# Altium PCB PCB2.PcbDoc (part 1 of 2)
Units mm, origin at the board's own origin, x right, y up, seen from the top; angles counter-clockwise.
Board outline 158 x 54 mm, 2 copper layers (Top Layer, Bottom Layer); 125 components, 171 nets, 620 pads, 62 vias.
Unrouted connection lines stored in the file: 120.
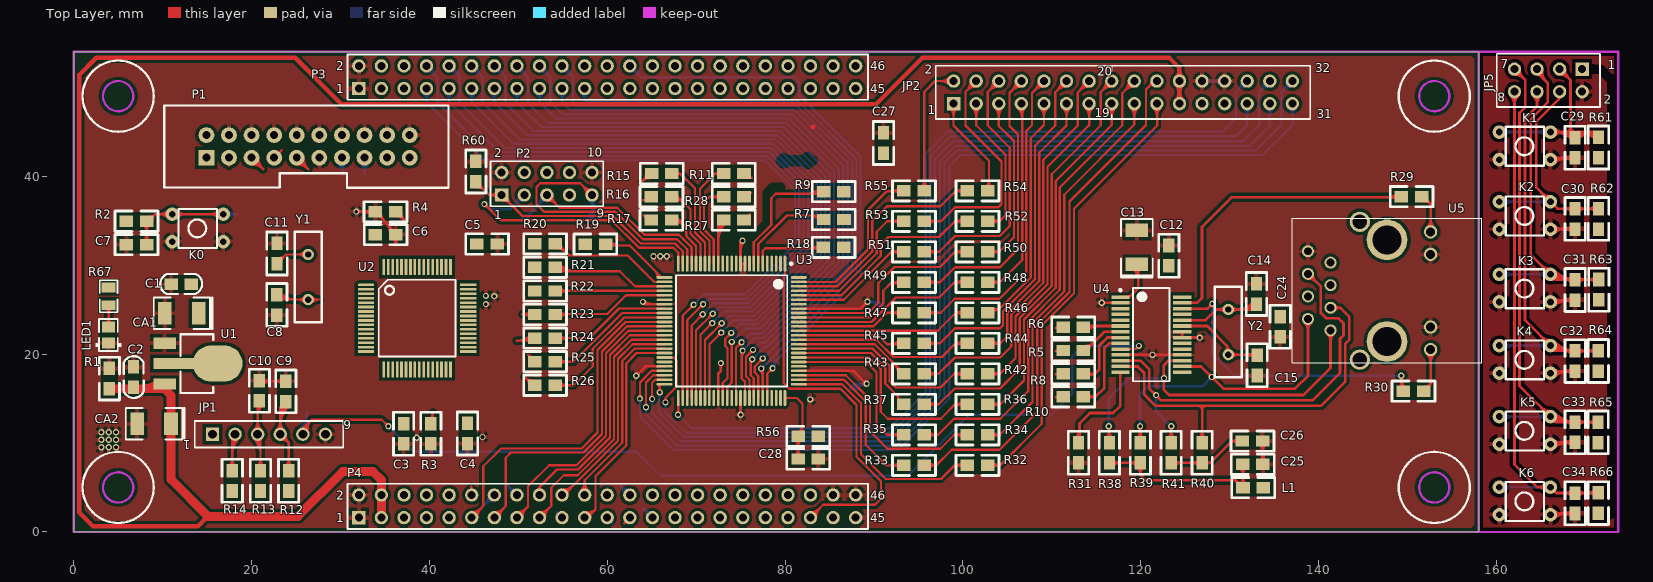
[diagram p0: Top Layer view]
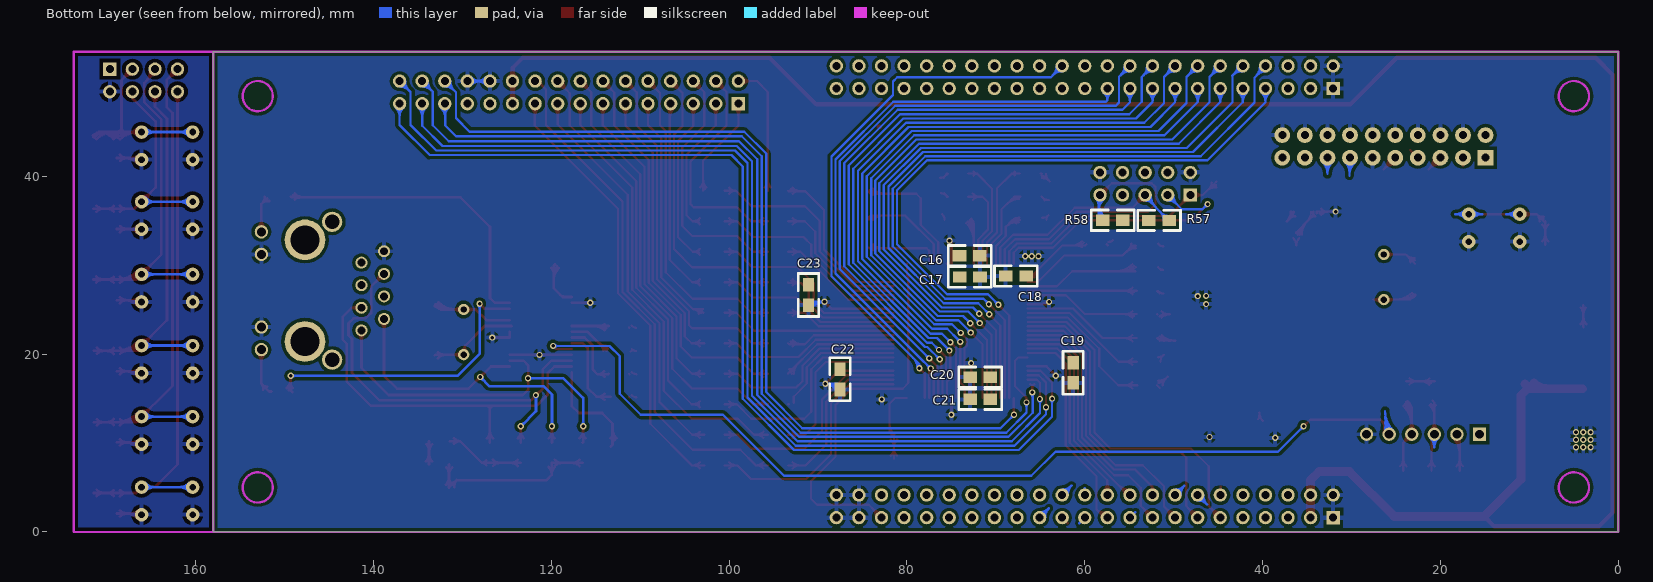
[diagram p1: Bottom Layer view, seen from below]

## Layer stack, top to bottom
Top Layer: signal copper 0.0356
Dielectric: dielectric 0.32, FR-4, Dk 4.8
Bottom Layer: signal copper 0.0356

## Board outline
0,0 0,54 158,54 158,0

## Design rules (kind name [scope] priority, off if disabled: settings)
Clearance [All] p1: gap=0.35
ComponentClearance [All] p1: gap=0.254 collisioncheckmode=3 verticalgap=0.254
PolygonConnect [All] p1: connectstyle=Relief reliefconductorwidth=0.5 reliefentries=4 polygonreliefangle="90 Angle"
RoutingVias [All] p1: holewidth=0.711 width=1.27 viastyle="Through Hole" minholewidth=0.711 minwidth=1.27 maxholewidth=0.711 maxwidth=1.27
SolderMaskExpansion [All] p1: expansion=0.102
TestPointUsage [All] p1: valid=0 allowmultiple=FALSE
Testpoint [All] p1: side=15 testpointundercomponent=TRUE minsize=1.016 maxsize=2.54 preferedsize=1.524 minholesize=0 maxholesize=1.016 preferedholesize=0.813 testpointgrid=0.025 style=1023 order=0-112345678
Width [All] p1: maxlimit=2 minlimit=0.254 preferedwidth=0.254 toplayer_prefwidth=0.3 bottomlayer_prefwidth=0.3 minimp=50.000000 maximp=50.000000 favimp=50.000000
18 further rules are at their usual default settings.

## Components (designator, comment, footprint, x,y, rotation, side; value= is the part's Value field where it differs from the comment)
C1 "0.1uF" 0805_CAP 12.93,27.74 r180 top
C2 "0.1uF" 0805_CAP 6.61,16.57 r90 top
C3 "104" C0805 37.11,9.644 r270 top
C4 "104" C0805 44.29,9.67 r270 top
C5 "104" C0805 47.89,32.38 r0 top
C6 "104" C0805 36.47,33.42 r0 top
C7 "104" C0805 8.46,32.3 r0 top
C8 "Cap" C0805 22.84,24.13 r270 top
C9 "101" C0805 23.85,14.4 r270 top
C10 "101" C0805 20.88,14.48 r270 top
C11 "Cap" C0805 22.87,29.91 r270 top
C12 "Cap Semi" C0805 123.16,32.46 r90 top
C13 "Cap Pol3" 1210C 119.59,30.13 r90 top
C14 "Cap Semi" C0805 133.01,28.15 r90 top
C15 "Cap Semi" C0805 133.09,17.33 r270 top
C16 "Cap" C0805 74.34,31.06 r0 bottom
C17 "Cap" C0805 74.32,28.66 r0 bottom
C18 "Cap" C0805 66.35,28.77 r180 bottom
C19 "Cap" C0805 61.31,19.29 r90 bottom
C20 "Cap" C0805 70.35,17.4 r180 bottom
C21 "Cap" C0805 70.35,14.9 r180 bottom
C22 "Cap" C0805 87.53,18.55 r90 bottom
C23 "Cap" C0805 91.07,28.03 r90 bottom
C24 "Cap Semi" C0805 135.67,21.67 r270 top
C25 "Cap Semi" C0805 131.2,7.59 r180 top
C26 "Cap Semi" C0805 131.17,10.21 r180 top
C27 "Cap" C0805 91.07,42.34 r270 top
C28 "Cap" C0805 81.21,8.2 r180 top
C29 "104" C0805 168.84,44.59 r90 top
C30 "104" C0805 168.84,36.594 r90 top
C31 "104" C0805 168.84,28.598 r90 top
C32 "104" C0805 168.84,20.602 r90 top
C33 "104" C0805 168.84,12.606 r90 top
C34 "104" C0805 168.84,4.61 r90 top
CA1 "4.7UF/16V" 3528cap 14.05,24.61 r180 top
CA2 "10UF/16V" 3528cap 10.92,12.18 r180 top
JP1 "ISP" PIN-FHEADER-1*6-2.54 15.61,10.98 r0 top
JP2 "Header2*16" PIN-S-2.54-2*16 98.95,48.18 r0 top locked
JP5 "Header2*4" PIN-S-2.54-2*4 169.64,52.04 r180 top
K0 "KEY" KEY-DIP 13.9,34.14 r180 top
K1 "SW-SPST" KEY-DIP 163.14,43.37 r180 top
K2 "SW-SPST" KEY-DIP 163.14,35.54 r180 top
K3 "SW-SPST" KEY-DIP 163.14,27.37 r180 top
K4 "SW-SPST" KEY-DIP 163.14,19.36 r180 top
K5 "SW-SPST" KEY-DIP 163.14,11.37 r180 top
K6 "SW-SPST" KEY-DIP 163.14,3.44 r180 top
L1 "Inductor" R0805 132.41,5.12 r180 top
LED1 "0805/Green" LED-0805 3.01,23.64 r270 top
P1 "Header 10X2" IDC-20 14.9,42.08 r0 top
P2 "Header 5X2" HDR2X5 48.13,37.88 r0 top
P3 "Header 23X2" HDR2X23 32.06,49.86 r0 top locked
P4 "Header 23X2" HDR2X23 32.06,1.604 r0 top locked
R1 "10K" 0805 4.01,18.38 r270 top
R2 "10k" R0805 7.29,34.78 r0 top
R3 "Res2" R0805 40.32,11.27 r90 top
R4 "Res2" R0805 35.29,35.84 r0 top
R5 "Res Semi" R0805 112.63,20.25 r0 top
R6 "Res Semi" R0805 112.63,22.86 r0 top
R7 "Res Semi" R0805 85.71,34.975 r0 top
R8 "Res Semi" R0805 112.63,17.63 r0 top
R9 "Res Semi" R0805 85.7,38.11 r0 top
R10 "Res Semi" R0805 112.63,15.04 r0 top
R11 "Res Semi" R0805 74.466,40.145 r0 top
R12 "Res2" R0805 24.03,5.51 r270 top
R13 "Res2" R0805 20.855,5.51 r270 top
R14 "Res2" R0805 17.68,5.51 r270 top
R15 "Res Semi" R0805 65.9,40.45 r180 top
R16 "Res Semi" R0805 65.88,37.84 r180 top
R17 "Res Semi" R0805 65.86,35.217 r180 top
R18 "Res Semi" R0805 85.68,31.84 r0 top
R19 "Res Semi" R0805 58.44,32.51 r180 top
R20 "Res Semi" R0805 52.78,32.55 r180 top
R21 "Res Semi" R0805 52.78,29.898 r180 top
R22 "Res Semi" R0805 52.78,27.247 r180 top
R23 "Res Semi" R0805 52.78,24.595 r180 top
R24 "Res Semi" R0805 52.78,21.943 r180 top
R25 "Res Semi" R0805 52.78,19.292 r180 top
R26 "Res Semi" R0805 52.78,16.64 r180 top
R27 "Res Semi" R0805 74.466,34.913 r0 top
R28 "Res Semi" R0805 74.466,37.535 r0 top
R29 "Res Semi" R0805 150.68,37.55 r0 top
R30 "Res Semi" R0805 150.9,15.67 r0 top
R31 "Res Semi" R0805 113.15,9.13 r90 top
R32 "Res2" R0805 101.404,7.63 r180 top
R33 "Res2" R0805 94.274,7.63 r180 top
R34 "Res2" R0805 101.404,11.061 r180 top
R35 "Res2" R0805 94.274,11.061 r180 top
R36 "Res2" R0805 101.404,14.492 r180 top
R37 "Res2" R0805 94.274,14.492 r180 top
R38 "Res Semi" R0805 116.625,9.13 r90 top
R39 "Res Semi" R0805 120.1,9.13 r90 top
R40 "Res Semi" R0805 127.05,9.13 r90 top
R41 "Res Semi" R0805 123.575,9.13 r90 top
R42 "Res2" R0805 101.404,17.923 r180 top
R43 "Res2" R0805 94.274,17.923 r180 top
R44 "Res2" R0805 101.404,21.355 r180 top
R45 "Res2" R0805 94.274,21.355 r180 top
R46 "Res2" R0805 101.404,24.786 r180 top
R47 "Res2" R0805 94.274,24.786 r180 top
R48 "Res2" R0805 101.404,28.217 r180 top
R49 "Res2" R0805 94.274,28.217 r180 top
R50 "Res2" R0805 101.404,31.648 r180 top
R51 "Res2" R0805 94.274,31.648 r180 top
R52 "Res2" R0805 101.404,35.079 r180 top
R53 "Res2" R0805 94.274,35.079 r180 top
R54 "Res2" R0805 101.404,38.51 r180 top
R55 "Res2" R0805 94.274,38.51 r180 top
R56 "Res2" R0805 82.83,10.59 r0 top
R57 "Res2" R0805 51.87,35.18 r0 bottom
R58 "Res2" R0805 56.62,34.89 r180 bottom
R60 "Res2" R0805 45.07,40.3 r270 top
R61 "Res2" R0805 171.32,42.99 r270 top
R62 "Res2" R0805 171.32,34.97 r270 top
R63 "Res2" R0805 171.35,27.01 r270 top
R64 "Res2" R0805 171.29,18.99 r270 top
R65 "Res2" R0805 171.27,10.96 r270 top
R66 "Res2" R0805 171.29,3.01 r270 top
R67 "1K/1%/0805/1/8W" R-0805 4.83,24.99 r90 top
U1 "AS1117-3.3V" SOT-223 16.17,18.93 r270 top
U2 "STM32" LQFP64 32.87,27.78 r0 top locked
U3 "EPM240GT100C5N" TQFP100_N 73.99,22.61 r270 top locked
U4 "ENC28J60" ENC28J60-ss 121.18,22.18 r0 top
U5 "HR911105A-RJ45" HR911105A 147.69,27.12 r270 top locked
Y1 "8MHZ" XTAL 26.37,26.12 r90 top
Y2 "25M" xtal 129.84,25.01 r270 top

## Footprints (in the part's own frame and the unit in brackets; to place one, negate y for a bottom-side part, rotate by r counter-clockwise, add the part's x,y. Pads: shape width x height; smd on the part's side, far side on the other; paste and mask are expansions set on the pad)
0805 [mil]
  rect 60x50 smd: 1(0,0) 2(90,0)
  silkscreen extent -50,-45 140,45
0805_CAP [mm]
  rect 1.524x1.27 smd: 1(-0.31,-0.11) 2(1.976,-0.11)
  silkscreen extent -1.51,-1.26 3.19,0.99
1210C [mil]
  rect 60x100 smd: 1(-1,1) 2(149,1)
  silkscreen extent -61,-69 199,71
3528cap [mil]
  rect 60x100 smd: 1(-1,1) 2(149,1)
  silkscreen extent -61,-69 199,71
C0805 [mil]
  rect 60x50 smd: 1(-100,0) 2(-10,0)
  silkscreen extent -150,-45 40,45
ENC28J60-ss [mm] "SOP, 28-Leads, Body 10.5x5.6mm (max), Pitch 0"
  rect 2.05x0.4 smd: 1(-3.475,4.225) 2(-3.475,3.575) 3(-3.475,2.925) 4(-3.475,2.275) 5(-3.475,1.625) 6(-3.475,0.975) 7(-3.475,0.325) 8(-3.475,-0.325) 9(-3.475,-0.975) 10(-3.475,-1.625) 11(-3.475,-2.275) 12(-3.475,-2.925) 13(-3.475,-3.575) 14(-3.475,-4.225) 15(3.475,-4.225) 16(3.475,-3.575) 17(3.475,-2.925) 18(3.475,-2.275) 19(3.475,-1.625) 20(3.475,-0.975) 21(3.475,-0.325) 22(3.475,0.325) 23(3.475,0.975) 24(3.475,1.625) 25(3.475,2.275) 26(3.475,2.925) 27(3.475,3.575) 28(3.475,4.225)
  silkscreen extent -3.6,-5.25 2.05,5.25, body extent -2.8,-5.25 2.8,5.25, height 2
HDR2X5 [mm] "Connector; Header; 5x2 Position"
  rect 1.5x1.5 hole 0.9: 1(0,0)
  round 1.5 hole 0.9: 2(0,2.54) 3(2.54,0) 4(2.54,2.54) 5(5.08,0) 6(5.08,2.54) 7(7.62,0) 8(7.62,2.54) 9(10.16,0) 10(10.16,2.54)
  silkscreen extent -1.27,-1.27 11.43,3.81
HDR2X23 [mm] "Connector; Header; 23x2 Position"
  rect 1.5x1.5 hole 0.9: 1(0,0)
  round 1.5 hole 0.9: 2(0,2.54) 3(2.54,0) 4(2.54,2.54) 5(5.08,0) 6(5.08,2.54) 7(7.62,0) 8(7.62,2.54) 9(10.16,0) 10(10.16,2.54) 11(12.7,0) 12(12.7,2.54) 13(15.24,0) 14(15.24,2.54) 15(17.78,0) 16(17.78,2.54) 17(20.32,0) 18(20.32,2.54) 19(22.86,0) 20(22.86,2.54) 21(25.4,0) 22(25.4,2.54) 23(27.94,0) 24(27.94,2.54) 25(30.48,0) 26(30.48,2.54) 27(33.02,0) 28(33.02,2.54) 29(35.56,0) 30(35.56,2.54) 31(38.1,0) 32(38.1,2.54) 33(40.64,0) 34(40.64,2.54) 35(43.18,0) 36(43.18,2.54) 37(45.72,0) 38(45.72,2.54) 39(48.26,0) 40(48.26,2.54) 41(50.8,0) 42(50.8,2.54) 43(53.34,0) 44(53.34,2.54) 45(55.88,0) 46(55.88,2.54)
  silkscreen extent -1.27,-1.27 57.28,3.81
HR911105A [mm]
  round 1.35 hole 0.89: 1(4.46,-6.35) 2(3.18,-8.89) 3(1.92,-6.35) 4(0.64,-8.89) 5(-0.62,-6.35) 6(-1.9,-8.89) 7(-3.16,-6.35) 8(-4.44,-8.89)
  round 1.5 hole 1.02: 9(6.625,4.9) 10(4.085,4.9) 11(-4.085,4.9) 12(-6.625,4.9)
  round 2.286 hole 1.63: ""(-7.745,-3.05) ""(7.745,-3.05)
  round 4.572 hole 3.25: ""(-5.715,0) ""(5.715,0)
  silkscreen extent -8.13,-10.67 8.13,10.67
IDC-20 [mil]
  rect 70x70 hole 35: 1(1,0)
  round 70 hole 35: 2(1,100) 3(101,0) 4(101,100) 5(201,0) 6(201,100) 7(301,0) 8(301,100) 9(401,0) 10(401,100) 11(501,0) 12(501,100) 13(601,0) 14(601,100) 15(701,0) 16(701,100) 17(801,0) 18(801,100) 19(901,0) 20(901,100)
  silkscreen extent -185,-133 1073,231
KEY-DIP [mil]
  round 60 hole 30: 1(-115,59.45) 2(-115,-62.6) 3(111,-62.6) 4(111,59.45)
  silkscreen extent -87,-86 83,87
LED-0805 [mm]
  rect 1.2x1.5 smd: 1(0.6,0.9) 2(2.4,0.9)
  silkscreen extent -0.3,-0.55 3.3,2.35
LQFP64 [mm]
  oval 1.8x0.3 smd: 1(0,0)
  rect 1.8x0.3 smd: 2(0,-0.5) 3(0,-1) 4(0,-1.5) 5(0,-2) 6(0,-2.5) 7(0,-3) 8(0,-3.5) 9(0,-4) 10(0,-4.5) 11(0,-5) 12(0,-5.5) 13(0,-6) 14(0,-6.5) 15(0,-7) 16(0,-7.5) 33(11.5,-7.5) 34(11.5,-7) 35(11.5,-6.5) 36(11.5,-6) 37(11.5,-5.5) 38(11.5,-5) 39(11.5,-4.5) 40(11.5,-4) 41(11.5,-3.5) 42(11.5,-3) 43(11.5,-2.5) 44(11.5,-2) 45(11.5,-1.5) 46(11.5,-1) 47(11.5,-0.5) 48(11.5,0)
  rect 0.3x1.8 smd: 17(2,-9.5) 18(2.5,-9.5) 19(3,-9.5) 20(3.5,-9.5) 21(4,-9.5) 22(4.5,-9.5) 23(5,-9.5) 24(5.5,-9.5) 25(6,-9.5) 26(6.5,-9.5) 27(7,-9.5) 28(7.5,-9.5) 29(8,-9.5) 30(8.5,-9.5) 31(9,-9.5) 32(9.5,-9.5) 49(9.5,2) 50(9,2) 51(8.5,2) 52(8,2) 53(7.5,2) 54(7,2) 55(6.5,2) 56(6,2) 57(5.5,2) 58(5,2) 59(4.5,2) 60(4,2) 61(3.5,2) 62(3,2) 63(2.5,2) 64(2,2)
  silkscreen extent 1.43,-8.07 10.07,0.56
PIN-FHEADER-1*6-2.54 [mm]
  rect 1.5x1.5 hole 1: 1(0,0)
  round 1.5 hole 1: 2(2.54,0) 3(5.08,0) 4(7.62,0) 5(10.16,0) 6(12.7,0)
  silkscreen extent -2,-1.5 14.7,1.5
PIN-S-2.54-2*4 [mm]
  rect 1.5x1.5 hole 0.9: 1(0,0)
  round 1.5 hole 0.9: 2(0,2.54) 3(2.54,0) 4(2.54,2.54) 5(5.08,0) 6(5.08,2.54) 7(7.62,0) 8(7.62,2.54)
  silkscreen extent -2,-1.73 9.62,4.27
PIN-S-2.54-2*16 [mm]
  rect 1.5x1.5 hole 0.9: 1(0,-0.025)
  round 1.5 hole 0.9: 2(0,2.515) 3(2.54,-0.025) 4(2.54,2.515) 5(5.08,-0.025) 6(5.08,2.515) 7(7.62,-0.025) 8(7.62,2.515) 9(10.16,-0.025) 10(10.16,2.515) 11(12.7,-0.025) 12(12.7,2.515) 13(15.24,-0.025) 14(15.24,2.515) 15(17.78,-0.025) 16(17.78,2.515) 17(20.32,-0.025) 18(20.32,2.515) 19(22.86,-0.025) 20(22.86,2.515) 21(25.4,-0.025) 22(25.4,2.515) 23(27.94,-0.025) 24(27.94,2.515) 25(30.48,-0.025) 26(30.48,2.515) 27(33.02,-0.025) 28(33.02,2.515) 29(35.56,-0.025) 30(35.56,2.515) 31(38.1,-0.025) 32(38.1,2.515)
  silkscreen extent -2,-1.76 40.1,4.24
R0805 [mil]
  rect 60x50 smd: 1(-54,6) 2(36,6)
  silkscreen extent -104,-39 86,51
R-0805 [mm]
  rect 1.1x1.6 smd: 1(0.5,0.9) 2(2.5,0.9)
  silkscreen extent -0.3,-0.1 3.3,1.9
SOT-223 [mil]
  rect 50x100 smd: 1(-90.5,-234) 3(90.5,-234)
  oval 160x220 smd: 2(0,1)
  rect 50x200 smd: 2(0,-184)
  silkscreen extent -130,-164 130,-19
TQFP100_N [mm] "100-Pin Plastic Thin Quad Flat Pack (TQFP100), IPC Medium Density"
  oval 1.8x0.3 smd: 1(-7.55,6) 2(-7.55,5.5) 3(-7.55,5) 4(-7.55,4.5) 5(-7.55,4) 6(-7.55,3.5) 7(-7.55,3) 8(-7.55,2.5) 9(-7.55,2) 10(-7.55,1.5) 11(-7.55,1) 12(-7.55,0.5) 13(-7.55,0) 14(-7.55,-0.5) 15(-7.55,-1) 16(-7.55,-1.5) 17(-7.55,-2) 18(-7.55,-2.5) 19(-7.55,-3) 20(-7.55,-3.5) 21(-7.55,-4) 22(-7.55,-4.5) 23(-7.55,-5) 24(-7.55,-5.5) 25(-7.55,-6) 51(7.55,-6) 52(7.55,-5.5) 53(7.55,-5) 54(7.55,-4.5) 55(7.55,-4) 56(7.55,-3.5) 57(7.55,-3) 58(7.55,-2.5) 59(7.55,-2) 60(7.55,-1.5) 61(7.55,-1) 62(7.55,-0.5) 63(7.55,0) 64(7.55,0.5) 65(7.55,1) 66(7.55,1.5) 67(7.55,2) 68(7.55,2.5) 69(7.55,3) 70(7.55,3.5) 71(7.55,4) 72(7.55,4.5) 73(7.55,5) 74(7.55,5.5) 75(7.55,6)
  oval 0.3x1.8 smd: 26(-6,-7.55) 27(-5.5,-7.55) 28(-5,-7.55) 29(-4.5,-7.55) 30(-4,-7.55) 31(-3.5,-7.55) 32(-3,-7.55) 33(-2.5,-7.55) 34(-2,-7.55) 35(-1.5,-7.55) 36(-1,-7.55) 37(-0.5,-7.55) 38(0,-7.55) 39(0.5,-7.55) 40(1,-7.55) 41(1.5,-7.55) 42(2,-7.55) 43(2.5,-7.55) 44(3,-7.55) 45(3.5,-7.55) 46(4,-7.55) 47(4.5,-7.55) 48(5,-7.55) 49(5.5,-7.55) 50(6,-7.55) 76(6,7.55) 77(5.5,7.55) 78(5,7.55) 79(4.5,7.55) 80(4,7.55) 81(3.5,7.55) 82(3,7.55) 83(2.5,7.55) 84(2,7.55) 85(1.5,7.55) 86(1,7.55) 87(0.5,7.55) 88(0,7.55) 89(-0.5,7.55) 90(-1,7.55) 91(-1.5,7.55) 92(-2,7.55) 93(-2.5,7.55) 94(-3,7.55) 95(-3.5,7.55) 96(-4,7.55) 97(-4.5,7.55) 98(-5,7.55) 99(-5.5,7.55) 100(-6,7.55)
  silkscreen extent -7.67,-6.25 6.25,6.83, body extent -7,-7 7,7, height 1.2
XTAL [mil]
  round 50 hole 28: 1(0,0) 2(200,0)
  silkscreen extent -100,-60 300,60
xtal [mil]
  round 50 hole 28: 1(0,0) 2(200,0)
  silkscreen extent -100,-60 300,60

## Part data
C1 C2: library part C
C3 C4 C5 C6: library part CAP, "Capacitor"
C7 C9 C10 C29 C30 C31 C32 C33 C34: library part Cap, "Capacitor"
C8 C11 C16 C17 C18 C19 C20 C21 C22 C23 C27 C28: "Capacitor"
C12 C14 C15 C24 C25 C26: "Capacitor (Semiconductor SIM Model)"
C13: "Polarized Capacitor (Surface Mount)"
CA1 CA2: library part ECAP
JP1: library part Header1*6
K1 K2 K3 K4 K5 K6: "Single-Pole, Single-Throw Switch"
LED1: library part ASD-0012AA
P1: "Header, 10-Pin, Dual row"
P2: "Header, 5-Pin, Dual row"
P3 P4: "Header, 23-Pin, Dual row"
R1: library part Res2, "Resistor"
R2: library part Res3, "Resistor"
R3 R4 R12 R13 R14 R32 R33 R34 R35 R36 R37 R42 R43 R44 R45 R46 R47 R48 R49 R50 R51 R52 R53 R54 R55 R56 R57 R58 R60 R61 R62 R63 R64 R65 R66: "Resistor"
R5 R6 R7 R8 R9 R10 R11 R15 R16 R17 R18 R19 R20 R21 R22 R23 R24 R25 R26 R27 R28 R29 R30 R31 R38 R39 R40 R41: "Semiconductor Resistor"
R67: library part ASR-0028BA
U1: library part AS1117
U2: library part STM32F103RE
U3: "MAX II 1.8V CPLD, 80 IOs, 240 Logic Elements, 100-Pin Plastic TQFP, Commercial Temperature, Speed Grade 5, Pb-Free"
Y1 Y2: library part XTAL, "Crystal Oscillator"

## Via types
v1: diameter 0.7, hole 0.4, Top Layer to Bottom Layer, 62 vias

## Nets (pads, with @x,y where several pads share a name; then routed paths per layer and width w, separated by ;. In a path a pad name is that pad's centre, name@x,y a point inside that pad or via, vN(x,y) a via of type N, cw(c..) or ccw(c..) an arc to the next point about the centre after c; other vN are vias at no path point)
BOOT0: R4.2 U2.60 | length 2.4
  Top Layer w0.3: R4.2@36.331,35.507 cw(c36.331,34.643) 36.943,35.254 ; R4.2@36.516,35.992 ccw(c37.27,35.992) R4.2@36.737,35.46 ; R4.2@36.816,35.992 ccw(c38.294,35.992) 37.249,34.948
BOOT1: R3.2 U2.28 | length 1.4
  Top Layer w0.254: R3.2@39.988,12.491 ccw(c39.066,13.413) 40.37,13.413 ; 40.37,13.049 ccw(c40.905,13.049) R3.2@40.527,12.671
CANRX: P4.26 U2.44 | length 3.8
  Bottom Layer w0.254: P4.26@61.917,4.144 ccw(c60.413,4.144) 61.476,5.208 ccw(c62.54,6.271) P4.26@62.54,4.767 ; P4.26@62.171,4.144 ccw(c61.28,4.144) 61.91,4.774 ccw(c62.54,5.404) P4.26@62.54,4.513
CANTX: P4.24 U2.45 | length 1.1
  Bottom Layer w0.254: P4.24@59.773,4.435 ccw(c59.411,4.9) 60,4.9 ccw(c60.589,4.9) P4.24@60.227,4.435
CLK0: U3.12
CPLD_R: R28.1 U3.17 | length 11.8
  Top Layer w0.254: U3.17@71.99,30.16 71.99,32.89 70.88,34 70.88,37.07 71.498,37.688 R28.1@73.094,37.688 ; R28.1@72.608,37.328 ccw(c71.741,36.461) 71.741,37.688 ccw(c71.741,38.914) R28.1@72.608,38.047
CPLD_W: R27.1 U3.16 | length 10.9
  Top Layer w0.254: U3.16@72.49,30.16 72.49,34.68 R27.1@72.7,34.89 ; 72.49,32.687 cw(c75.345,32.687) R27.1@73.326,34.706 ; 72.49,33.3 cw(c74.732,33.3) R27.1@73.147,34.885 ; 72.49,33.913 cw(c74.119,33.913) R27.1@72.967,35.065 ; R27.1@72.49,34.527 cw(c73.505,34.527) R27.1@72.787,35.245
DB0: R19.1 U3.26 | length 12.2
  Top Layer w0.254: R19.1@59.812,32.358 59.97,32.199 62.531,32.199 66.12,28.61 U3.26@66.44,28.61 ; R19.1@60.118,32.537 ccw(c60.934,33.353) 60.934,32.199 ; R19.1@60.298,31.998 cw(c60.783,31.514) 60.783,32.199 ; R19.1@60.298,32.717 ccw(c61.547,33.966) 61.547,32.199 ; 65.347,29.383 cw(c64.573,28.61) U3.26@65.667,28.61 ; 65.78,28.95 cw(c65.441,28.61) U3.26@65.921,28.61
DB1: R20.1 U3.27 | length 16.6
  Top Layer w0.254: R20.1@54.23,32.21 54.61,32.21 55.75,31.07 62.32,31.07 65.28,28.11 U3.27@66.44,28.11 ; R20.1@54.279,31.89 cw(c54.279,30.316) 55.391,31.429 ; R20.1@54.279,32.144 cw(c54.279,31.183) 54.958,31.862 ; R20.1@54.787,32.398 ccw(c55.666,32.398) 55.044,31.776
DB2: R21.1 U3.28 | length 17.8
  Top Layer w0.254: R21.1@54.279,29.746 ccw(c55.331,30.798) 55.331,29.31 ; R21.1@54.31,29.31 61.41,29.31 63.11,27.61 U3.28@66.44,27.61 ; R21.1@54.458,29.926 ccw(c55.944,31.412) 55.944,29.31 ; R21.1@54.638,30.105 ccw(c56.557,32.025) 56.557,29.31
DB3: R22.1 U3.29 | length 14.7
  Top Layer w0.254: R22.1@54.152,27.094 54.167,27.11 U3.29@66.44,27.11 ; R22.1@54.458,26.915 cw(c54.93,26.443) 54.93,27.11 ; R22.1@54.638,26.735 cw(c55.543,25.83) 55.543,27.11 ; R22.1@54.638,27.453 ccw(c55.467,28.283) 55.467,27.11
DB4: R23.1 U3.30 | length 15.7
  Top Layer w0.254: R23.1@54.152,24.5 60.01,24.5 62.12,26.61 U3.30@66.44,26.61 ; R23.1@54.458,24.263 cw(c55.03,23.691) 55.03,24.5 ; R23.1@54.638,24.083 cw(c55.644,23.078) 55.644,24.5 ; R23.1@54.638,24.802 ccw(c55.366,25.53) 55.366,24.5
DB5: R24.1 U3.33 | length 15.6
  Top Layer w0.254: R24.1@54.152,21.791 58.001,21.791 61.32,25.11 U3.33@66.44,25.11 ; R24.1@54.638,21.432 cw(c55.505,20.565) 55.505,21.791 cw(c55.505,23.017) R24.1@54.638,22.15
DB6: R25.1 U3.34 | length 16.5
  Top Layer w0.254: R25.1@54.152,19.139 56.219,19.139 61.69,24.61 U3.34@66.44,24.61 ; R25.1@54.638,18.78 cw(c55.505,17.913) 55.505,19.139 cw(c55.505,20.366) R25.1@54.638,19.498
DB7: R26.1 U3.35 | length 18.6
  Top Layer w0.254: R26.1@54.112,16.488 56.248,16.488 58.38,18.62 58.38,20.59 61.9,24.11 U3.35@66.44,24.11 ; R26.1@54.638,16.128 cw(c55.505,15.261) 55.505,16.488 cw(c55.505,17.714) R26.1@54.638,16.847
ENABLE1: P4.16 U2.14 | length 3.8
  Bottom Layer w0.254: P4.16@49.217,4.144 ccw(c47.713,4.144) 48.776,5.208 ccw(c49.84,6.271) P4.16@49.84,4.767 ; P4.16@49.471,4.144 ccw(c48.58,4.144) 49.21,4.774 ccw(c49.84,5.404) P4.16@49.84,4.513
ENABLE2: P4.23 U2.15 | length 1.4
  Bottom Layer w0.254: P4.23@60,1.235 cw(c60,0.344) 60.63,0.974 cw(c61.26,1.604) P4.23@60.369,1.604
ENC-INT: U2.27 U4.4
GND: C1.2 C2.2 C3.2 C4.2 C5.2 C6.2 C7.1 C8.2 C9.1 C10.1 C11.1 C12.2 C13.2 C14.2 C15.2 C16.1 C17.1 C18.1 C19.1 C20.1 C21.1 C22.1 C23.1 C24.2 C25.1 C26.1 C27.1 C28.1 C29.1 C30.1 C31.1 C32.1 C33.1 C34.1 CA1.2 CA2.2 JP1.6 JP2.24 JP2.26 JP5.2 K0.1 K0.4 K1.1 K1.4 K2.1 K2.4 K3.1 K3.4 K4.1 K4.4 K5.1 K5.4 K6.1 K6.4 LED1.2 P1.4 P1.6 P1.8 P1.10 P1.11 P1.12 P1.14 P1.16 P1.18 P1.20 P2.2 P2.10 P3.1 P3.2 P4.1 P4.2 P4.43 P4.44 P4.45 P4.46 R1.1 R3.1 R4.1 R31.1 R60.1 U1.1 U2.12 U2.18 U2.31 U2.47 U2.63 U3.10 U3.11 U3.32 U3.46 U3.60 U3.65 U3.79 U3.93 U4.2 U4.11 U4.18 U4.21 U4.22 U5.8 U5.10 U5.11 | length 151.4
  Top Layer w0.254: C10.1@20.63,16.95 20.64,16.94 C9.1@23.85,16.94 ; C10.1@21.06,16.713 cw(c21.607,16.166) 21.607,16.94 ; C10.1@21.239,16.534 cw(c22.22,15.553) 22.22,16.94 ; C10.1@21.239,17.252 ccw(c21.993,18.006) 21.993,16.94 ; C9.1@23.491,16.581 ccw(c22.624,15.714) 22.624,16.94 ccw(c22.624,18.166) C9.1@23.491,17.299 ; v1(31.79,36.02) 33.891,36.02 R4.1@33.918,35.992 R4.1@33.918,35.842 ; v1@31.948,35.862 cw(c32.328,35.482) 32.328,36.02 cw(c32.328,36.558) v1@31.948,36.178 ; 32.498,36.02 cw(c32.498,34.699) R4.1@33.432,35.633 ; 32.632,36.02 ccw(c32.632,37.152) R4.1@33.432,36.352 ; 33.112,36.02 cw(c33.112,35.313) R4.1@33.612,35.813 ; R4.1@34.045,35.484 cw(c34.045,34.567) 34.694,35.216 ; R4.1@34.23,35.68 36.216,33.694 C6.2@36.216,33.544 ; R4.1@34.299,35.992 ccw(c35.221,35.992) 34.569,35.341 ; R4.1@34.553,35.992 ccw(c36.088,35.992) 35.003,34.907 ; 34.938,34.972 cw(c33.386,33.42) C6.2@35.581,33.42 ; 35.372,34.538 cw(c34.254,33.42) C6.2@35.835,33.42 ; 35.805,34.105 cw(c35.121,33.42) C6.2@36.089,33.42 ; C6.2@35.857,33.061 cw(c34.99,32.194) 36.216,32.194 cw(c37.442,32.194) C6.2@36.575,33.061 ; v1@63.988,25.838 ccw(c64.539,26.389) 64.539,25.61 ; v1(64.01,25.86) 64.26,25.61 U3.32@66.44,25.61 ; v1@64.168,26.018 ccw(c65.152,27.002) 65.152,25.61
  Top Layer w0.3: v1@63.26,17.77 ccw(c63.26,18.253) 63.601,17.911 ccw(c63.943,17.57) v1@63.46,17.57 ; v1@63.325,17.635 64.3,18.61 U3.46@66.44,18.61 ; U3.60@72.49,15.06 72.49,17.82 72.78,18.11 v1(72.78,18.98) ; v1@72.639,18.839 cw(c72.297,18.497) 72.78,18.497 cw(c73.263,18.497) v1@72.921,18.839 ; v1@74.849,13.311 ccw(c74.507,13.653) 74.99,13.653 ccw(c75.473,13.653) v1@75.131,13.311 ; v1(74.99,13.17) U3.65@74.99,15.06 ; 74.99,31.736 cw(c76.224,31.736) v1@75.351,32.609 ; 74.99,32.46 cw(c75.5,32.46) v1@75.139,32.821 ; v1(75.21,32.75) 74.99,32.53 U3.11@74.99,30.16 U3.10@75.49,30.16 ; U3.79@81.54,18.11 87.71,18.11 v1(89.17,16.65) ; U3.93@81.54,25.11 88.51,25.11 v1(89.27,25.87) ; v1@88.97,16.65 ccw(c88.487,16.65) 88.829,16.991 ccw(c89.17,17.333) v1@89.17,16.85 ; v1@89.07,25.87 cw(c88.587,25.87) 88.929,25.529 cw(c89.27,25.187) v1@89.27,25.67 ; v1(115.605,25.755) U4.2@117.705,25.755 ; v1@115.746,25.614 cw(c116.088,25.272) 116.088,25.755 cw(c116.088,26.238) v1@115.746,25.896 ; U4.11@117.705,19.905 U4.18@124.655,19.905 ; v1@121.179,19.764 ccw(c120.837,19.422) 120.837,19.905 ccw(c120.837,20.388) v1@121.179,20.046 ; v1@121.461,19.764 cw(c121.803,19.422) 121.803,19.905 cw(c121.803,20.388) v1@121.461,20.046 ; U4.22@124.655,22.505 U4.21@124.655,21.855 v1(126.625,21.855) ; v1@126.484,21.714 ccw(c126.142,21.372) 126.142,21.855 ccw(c126.142,22.338) v1@126.484,21.996 ; C26.1@133.367,9.867 cw(c132.467,8.967) 133.74,8.967 ; C25.1@133.397,7.933 ccw(c132.569,8.761) 133.74,8.761 ccw(c134.911,8.761) C25.1@134.083,7.933 ; C26.1@133.71,10.21 133.74,10.18 C25.1@133.74,7.59 ; 133.74,9.112 cw(c134.808,9.112) C26.1@134.053,9.867 ; K3.1@165.99,25.61 166.438,26.058 C31.1@168.84,26.058 ; K6.1@166.061,1.93 166.201,2.07 C34.1@168.84,2.07 ; K5.1@166.061,9.86 166.267,10.066 C33.1@168.84,10.066 ; K4.1@166.061,17.85 166.273,18.062 C32.1@168.84,18.062 ; K2.1@166.061,34.03 166.085,34.054 C30.1@168.84,34.054 ; K1.1@166.061,41.86 166.251,42.05 C29.1@168.84,42.05 ; K6.1@166.282,1.709 cw(c167.152,0.839) 167.152,2.07 ; K5.1@166.282,9.639 cw(c167.312,8.61) 167.312,10.066 ; K4.1@166.282,17.629 cw(c167.326,16.585) 167.326,18.062 ; K3.1@166.282,25.639 cw(c167.292,24.629) 167.292,26.058 ; K2.1@166.282,33.809 cw(c166.872,33.219) 166.872,34.054 ; K1.1@166.282,41.639 cw(c167.273,40.648) 167.273,42.05 ; K6.1@166.494,1.497 cw(c167.876,0.115) 167.876,2.07 ; K6.1@166.494,2.363 ccw(c167.201,3.07) 167.201,2.07 ; K5.1@166.494,9.427 cw(c168.036,7.885) 168.036,10.066 ; K5.1@166.494,10.293 ccw(c167.041,10.84) 167.041,10.066 ; K4.1@166.494,17.417 cw(c168.05,15.861) 168.05,18.062 ; K4.1@166.494,18.283 ccw(c167.027,18.816) 167.027,18.062 ; K3.1@166.494,25.427 cw(c168.016,23.905) 168.016,26.058 ; K3.1@166.494,26.293 ccw(c167.061,26.86) 167.061,26.058 ; K2.1@166.494,33.597 cw(c167.596,32.495) 167.596,34.054 ; K2.1@166.494,34.463 ccw(c167.481,35.45) 167.481,34.054 ; K1.1@166.494,41.427 cw(c167.997,39.924) 167.997,42.05 ; K1.1@166.494,42.293 ccw(c167.08,42.879) 167.08,42.05 ; C34.1@168.497,1.727 ccw(c167.669,0.899) 167.669,2.07 ccw(c167.669,3.241) C34.1@168.497,2.413 ; C33.1@168.497,9.723 ccw(c167.669,8.895) 167.669,10.066 ccw(c167.669,11.237) C33.1@168.497,10.409 ; C32.1@168.497,17.719 ccw(c167.669,16.891) 167.669,18.062 ccw(c167.669,19.233) C32.1@168.497,18.405 ; C31.1@168.497,25.715 ccw(c167.669,24.887) 167.669,26.058 ccw(c167.669,27.229) C31.1@168.497,26.401 ; C30.1@168.497,33.711 ccw(c167.669,32.883) 167.669,34.054 ccw(c167.669,35.225) C30.1@168.497,34.397 ; C29.1@168.497,41.707 ccw(c167.669,40.879) 167.669,42.05 ccw(c167.669,43.221) C29.1@168.497,42.393
  Top Layer w0.5: 83.056,45.566 83.164,45.566
  Bottom Layer w0.3: C22.1@87.32,16.12 87.85,16.65 v1(89.17,16.65) ccw(c89.17,15.289) C22.1@87.961,15.914 ; C22.1@87.428,16.19 cw(c88.184,15.799) 88.184,16.65 ; C22.1@87.694,16.052 cw(c88.677,15.544) 88.677,16.65 ; v1@89.029,16.509 ccw(c88.687,16.167) 88.687,16.65 ccw(c88.687,17.133) v1@89.029,16.791 ; v1(89.27,25.87) 90.54,25.87 C23.1@91.13,25.28 ; v1@89.288,25.87 cw(c89.288,23.835) C23.1@90.727,25.274 ; v1@89.411,25.729 cw(c89.753,25.387) 89.753,25.87 cw(c89.753,26.353) v1@89.411,26.011 ; 90.013,25.87 cw(c90.013,24.56) C23.1@90.939,25.486 ; JP2.24@126.89,50.695 JP2.26@129.43,50.695 ; JP2.24@127.314,50.27 cw(c128.339,49.246) 128.339,50.695 cw(c128.339,52.143) JP2.24@127.314,51.119 ; JP2.26@129.006,50.27 ccw(c127.981,49.246) 127.981,50.695 ccw(c127.981,52.143) JP2.26@129.006,51.119
  other v1: 3.12,9.51 3.94,9.51 4.76,9.51 3.12,10.355 3.94,10.355 4.76,10.355 38.59,10.58 45.97,10.67 3.12,11.2 3.94,11.2 4.76,11.2 82.82,14.9 63.26,17.57 121.32,19.905 46.36,25.62 46.36,26.53 47.3,26.52 65.2,31 65.95,31 66.7,31
GPIO_20: P4.41 U3.1 | length 47
  Top Layer w0.254: U3.1@79.99,30.16 79.99,28.89 79.84,28.74 79.84,16.73 80.48,16.09 86.23,16.09 88.04,14.28 88.04,8.45 90.79,5.7 90.79,3.72 90.11,3.04 84.296,3.04 P4.41@82.86,1.604 ; P4.41@82.86,1.973 ccw(c82.86,2.864) 83.49,2.234 ccw(c84.12,1.604) P4.41@83.229,1.604 ; P4.41@82.86,2.227 ccw(c82.86,3.731) 83.923,2.668 ccw(c84.987,1.604) P4.41@83.483,1.604
I2C1_SCL: P4.19 U2.58 | length 1.4
  Bottom Layer w0.254: P4.19@54.551,1.604 ccw(c53.66,1.604) 54.29,2.234 ccw(c54.92,2.864) P4.19@54.92,1.973
I2C1_SDA: U2.59 U3.15
I2C1_SDA-O: P4.20 U3.41 | length 27.4
  Top Layer w0.254: P4.20@54.92,4.144 55.124,4.144 61.222,10.242 61.222,19.452 62.88,21.11 U3.41@66.44,21.11 ; P4.20@54.92,4.513 ccw(c54.92,5.896) 55.898,4.918 ; P4.20@54.92,4.767 ccw(c54.92,6.764) 56.332,5.352 ; P4.20@55.543,4.144 cw(c56.554,4.144) 55.839,4.859
IO2: U3.2
IO3: U3.3
IO4: U3.4
IO5: U3.5
IO72: U3.72
IO73: U3.73
IO74: U3.74
IO100: U3.100
JNTRST: P1.3 U2.56 | length 1.1
  Top Layer w0.254: P1.3@17.201,41.646 cw(c16.916,41.176) 17.465,41.176 cw(c18.015,41.176) P1.3@17.729,41.646
JTCK: P1.9 U2.49 | length 4.8
  Top Layer w0.254: P1.9@25.085,41.318 cw(c25.085,39.478) 26.386,40.779 cw(c27.687,42.08) P1.9@25.847,42.08 ; P1.9@25.085,41.572 cw(c25.085,40.346) 25.953,41.213 cw(c26.82,42.08) P1.9@25.593,42.08
JTDI: P1.5 U2.50 | length 4.8
  Top Layer w0.254: P1.5@20.005,41.318 cw(c20.005,39.478) 21.306,40.779 cw(c22.607,42.08) P1.5@20.767,42.08 ; P1.5@20.005,41.572 cw(c20.005,40.346) 20.873,41.213 cw(c21.74,42.08) P1.5@20.513,42.08
JTDO: P1.13 U2.55 | length 4.9
  Bottom Layer w0.254: P1.13@29.627,41.541 cw(c28.146,40.06) 30.24,40.06 ; P1.13@29.806,41.721 cw(c28.759,40.673) 30.24,40.673 ; P1.13@30.165,42.08 P1.13@30.24,42.005 ; 30.24,40.42 cw(c31.825,40.42) P1.13@30.704,41.541 ; 30.24,41.034 cw(c31.212,41.034) P1.13@30.525,41.721
JTMS: P1.7 U2.46 | length 1.9
  Top Layer w0.254: P1.7@22.551,42.588 ccw(c22.565,43.767) 23.399,42.933 ccw(c24.233,42.099) P1.7@23.053,42.086
KEY1: C29.2 JP2.27 JP5.3 K1.2 K1.3 R61.1 U3.44 | length 156.1
  Top Layer w0.254: v1@66.396,14.722 ccw(c66.055,15.08) 66.55,15.08 ; U3.44@66.44,19.61 67.49,19.61 67.85,19.25 67.85,16.38 66.55,15.08 ; v1(66.55,14.56) 66.55,15.08 ; v1@66.704,14.722 cw(c67.045,15.08) 66.55,15.08
  Top Layer w0.3: K1.2@166.061,44.96 R61.1@170.874,44.96 ; K1.2@166.469,44.96 cw(c166.469,42.092) C29.2@168.497,44.12 ; K1.2@166.494,44.527 cw(c167.538,43.482) 167.538,44.96 cw(c167.538,46.437) K1.2@166.494,45.393 ; JP5.3@167.1,51.44 cw(c167.1,49.991) 168.124,51.016 cw(c169.149,52.04) JP5.3@167.7,52.04 ; JP5.3@167.1,52.04 168.33,50.81 168.33,45.3 ; 167.194,44.96 cw(c167.194,42.817) C29.2@168.709,44.332 ; 167.918,44.96 cw(c167.918,43.541) C29.2@168.921,44.544 ; 167.99,44.96 168.33,45.3 ; 168.517,45.113 cw(c168.099,44.695) C29.2@168.663,44.518 ; C29.2@168.57,45.06 ccw(c168.84,45.329) C29.2@168.84,44.948 ; C29.2@168.67,44.96 168.33,45.3 ; C29.2@168.75,44.535 cw(c169.631,43.835) 169.631,44.96 ; C29.2@168.985,44.348 cw(c170.253,43.341) 170.253,44.96 ; C29.2@169.163,44.96 cw(c169.163,42.18) R61.1@171.129,44.146 ; C29.2@169.22,44.161 cw(c170.874,42.848) R61.1@170.874,44.96 ; 169.888,44.96 cw(c169.888,42.904) R61.1@171.342,44.358 ; 170.612,44.96 cw(c170.612,43.628) R61.1@171.554,44.57 ; R61.1@171.472,44.362 R61.1@170.874,44.96
  Bottom Layer w0.254: v1@66.392,14.402 cw(c65.987,13.997) 66.56,13.997 ; 66.56,14.046 cw(c67.064,14.046) v1@66.708,14.402 ; v1@66.56,14.59 66.56,13.42 68.82,11.16 91.94,11.16 96.32,15.54 96.32,42.24 98.58,44.5 130.72,44.5 131.93,45.71 131.93,48.115 JP2.27@131.97,48.155 ; JP2.27@131.529,47.714 cw(c130.563,46.747) 131.93,46.747 ; JP2.27@131.709,47.894 cw(c131.176,47.36) 131.93,47.36 ; 131.93,46.554 cw(c133.571,46.554) JP2.27@132.411,47.714 ; 131.93,47.167 cw(c132.957,47.167) JP2.27@132.231,47.894
  Bottom Layer w0.3: K1.3@160.321,44.96 K1.2@166.061,44.96 ; K1.3@160.753,44.527 cw(c161.798,43.482) 161.798,44.96 cw(c161.798,46.437) K1.3@160.753,45.393 ; K1.2@165.628,44.527 ccw(c164.583,43.482) 164.583,44.96 ccw(c164.583,46.437) K1.2@165.628,45.393
KEY2: C30.2 JP2.28 JP5.4 K2.2 K2.3 R62.1 U3.51 | length 143.6
  Top Layer w0.254: v1@67.802,13.328 ccw(c67.349,13.781) 67.99,13.781 ; v1(67.96,13.17) 67.99,13.2 U3.51@67.99,15.06 ; 67.99,13.636 ccw(c68.426,13.636) v1@68.118,13.328
  Top Layer w0.3: K2.2@165.449,37.13 ccw(c163.971,37.13) 165.016,38.175 ccw(c166.061,39.219) K2.2@166.061,37.742 ; JP5.4@167.1,49.5 167.1,48.75 164.49,46.14 164.49,38.701 166.849,36.342 R62.1@171.472,36.342 ; 167.665,36.342 cw(c167.665,35.165) C30.2@168.497,35.997 ; 167.673,36.342 ccw(c167.673,37.507) C30.2@168.497,36.683 ; C30.2@169.183,35.997 cw(c170.015,35.165) 170.015,36.342 ; C30.2@169.183,36.683 ccw(c170.007,37.507) 170.007,36.342 ; R62.1@171.129,35.999 ccw(c170.302,35.171) 170.302,36.342 ccw(c170.302,37.512) R62.1@171.129,36.685
  Bottom Layer w0.254: v1@67.96,12.947 cw(c67.96,12.409) 68.341,12.789 cw(c68.721,13.17) v1@68.183,13.17 ; v1(67.96,13.17) 69.47,11.66 91.76,11.66 95.82,15.72 95.82,42.55 98.28,45.01 129.2,45.01 130.72,46.53 130.72,49.445 JP2.28@131.97,50.695 ; JP2.28@131.347,50.695 cw(c129.843,50.695) 130.906,49.631 cw(c131.97,48.568) JP2.28@131.97,50.072 ; JP2.28@131.601,50.695 cw(c130.71,50.695) 131.34,50.065 cw(c131.97,49.435) JP2.28@131.97,50.326
  Bottom Layer w0.3: K2.3@160.321,37.13 K2.2@166.061,37.13 ; K2.3@160.753,36.697 cw(c161.798,35.652) 161.798,37.13 cw(c161.798,38.607) K2.3@160.753,37.563 ; K2.2@165.628,36.697 ccw(c164.583,35.652) 164.583,37.13 ccw(c164.583,38.607) K2.2@165.628,37.563
KEY3: C31.2 JP2.29 JP5.5 K3.2 K3.3 R63.1 U3.49 | length 173.2
  Top Layer w0.254: v1@64.882,15.098 ccw(c64.502,15.478) 65.04,15.478 ccw(c65.578,15.478) v1@65.198,15.098 ; v1(65.04,14.94) 65.04,16.77 65.38,17.11 U3.49@66.44,17.11
  Top Layer w0.3: JP5.5@164.56,51.44 cw(c164.56,50.909) 164.936,51.284 ; JP5.5@164.56,52.04 164.56,51.66 165.75,50.47 165.75,48.3 163.85,46.4 163.85,31.171 166.639,28.382 R63.1@171.502,28.382 ; JP5.5@164.856,51.99 ccw(c165.892,51.814) 165.149,51.071 ; JP5.5@165.152,51.94 ccw(c166.595,51.695) 165.56,50.66 ; K3.2@165.449,28.96 ccw(c163.971,28.96) 165.016,30.005 ccw(c166.061,31.049) K3.2@166.061,29.572 ; K3.2@165.857,28.756 ccw(c166.762,29.661) 166.762,28.382 ; K3.2@166.069,28.968 ccw(c167.486,30.385) 167.486,28.382 ; K3.2@166.282,29.181 ccw(c168.211,31.11) C31.2@168.211,28.382 ; K3.2@166.494,29.393 ccw(c168.935,31.834) C31.2@168.935,28.382 ; 167.578,28.382 cw(c167.578,27.082) C31.2@168.497,28.001 ; 167.76,28.382 ccw(c167.76,29.424) C31.2@168.497,28.687 ; C31.2@169.183,28.001 cw(c170.102,27.082) 170.102,28.382 ; C31.2@169.183,28.687 ccw(c169.92,29.424) 169.92,28.382 ; R63.1@171.159,28.039 ccw(c170.332,27.211) 170.332,28.382 ccw(c170.332,29.552) R63.1@171.159,28.725
  Bottom Layer w0.254: v1@64.882,14.782 cw(c64.502,14.402) 65.04,14.402 cw(c65.578,14.402) v1@65.198,14.782 ; v1(65.04,14.94) 65.04,13.37 68.22,10.19 92.31,10.19 97.42,15.3 97.42,41.68 99.13,43.39 132.22,43.39 134.51,45.68 JP2.29@134.51,48.155 ; JP2.29@134.069,47.714 cw(c133.006,46.651) 134.51,46.651 cw(c136.014,46.651) JP2.29@134.951,47.714 ; JP2.29@134.249,47.894 cw(c133.619,47.264) 134.51,47.264 cw(c135.401,47.264) JP2.29@134.771,47.894
  Bottom Layer w0.3: K3.3@160.321,28.96 K3.2@166.061,28.96 ; K3.3@160.753,28.527 cw(c161.798,27.482) 161.798,28.96 cw(c161.798,30.437) K3.3@160.753,29.393 ; K3.2@165.628,28.527 ccw(c164.583,27.482) 164.583,28.96 ccw(c164.583,30.437) K3.2@165.628,29.393
KEY4: C32.2 JP2.30 JP5.6 K4.2 K4.3 R64.1 U3.50 | length 177.8
  Top Layer w0.254: U3.50@65.674,16.594 cw(c65.127,16.048) 65.9,16.048 ; U3.50@65.683,16.588 cw(c65.588,16.291) 65.9,16.291 ; v1@65.742,15.838 ccw(c65.362,16.218) 65.9,16.218 ccw(c66.438,16.218) v1@66.058,15.838 ; v1(65.9,15.68) 65.9,16.37 U3.50@66.163,16.633
  Top Layer w0.3: JP5.6@164.136,49.076 cw(c163.111,48.051) 164.56,48.051 cw(c166.009,48.051) JP5.6@164.984,49.076 ; JP5.6@164.56,49.5 164.56,47.817 163.2,46.457 163.2,23.811 166.649,20.362 R64.1@171.442,20.362 ; K4.2@165.449,20.95 ccw(c163.971,20.95) 165.016,21.995 ccw(c166.061,23.039) K4.2@166.061,21.562 ; K4.2@165.857,20.746 ccw(c166.786,21.675) 166.786,20.362 ; K4.2@166.069,20.958 ccw(c167.51,22.399) 167.51,20.362 ; K4.2@166.282,21.171 ccw(c168.235,23.124) C32.2@168.235,20.362 ; K4.2@166.494,21.383 ccw(c168.959,23.848) C32.2@168.959,20.362 ; 167.636,20.362 cw(c167.636,19.144) C32.2@168.497,20.005 ; 167.702,20.362 ccw(c167.702,21.486) C32.2@168.497,20.691 ; C32.2@169.183,20.005 cw(c170.044,19.144) 170.044,20.362 ; C32.2@169.183,20.691 ccw(c169.978,21.486) 169.978,20.362 ; R64.1@171.099,20.019 ccw(c170.272,19.191) 170.272,20.362 ccw(c170.272,21.532) R64.1@171.099,20.705
  Bottom Layer w0.254: v1@65.742,15.522 cw(c65.458,15.238) 65.86,15.238 ; 65.86,15.045 cw(c66.535,15.045) v1@66.058,15.522 ; v1(65.9,15.68) 65.86,15.64 65.86,13.41 68.58,10.69 92.13,10.69 96.83,15.39 96.83,41.9 98.87,43.94 131.53,43.94 133.31,45.72 133.31,49.495 JP2.30@134.51,50.695 ; JP2.30@133.887,50.695 cw(c132.383,50.695) 133.446,49.631 cw(c134.51,48.568) JP2.30@134.51,50.072 ; JP2.30@134.141,50.695 cw(c133.25,50.695) 133.88,50.065 cw(c134.51,49.435) JP2.30@134.51,50.326
  Bottom Layer w0.3: K4.3@160.321,20.95 K4.2@166.061,20.95 ; K4.3@160.753,20.517 cw(c161.798,19.472) 161.798,20.95 cw(c161.798,22.427) K4.3@160.753,21.383 ; K4.2@165.628,20.517 ccw(c164.583,19.472) 164.583,20.95 ccw(c164.583,22.427) K4.2@165.628,21.383
KEY5: C33.2 JP2.31 JP5.7 K5.2 K5.3 R65.1 U3.47 | length 195.8
  Top Layer w0.254: v1@63.522,15.148 ccw(c63.142,15.528) 63.68,15.528 ccw(c64.218,15.528) v1@63.838,15.148 ; v1(63.68,14.99) 63.68,16.81 64.98,18.11 U3.47@66.44,18.11
  Top Layer w0.3: JP5.7@162.02,51.44 cw(c162.02,49.991) 163.044,51.016 cw(c164.069,52.04) JP5.7@162.62,52.04 ; JP5.7@162.02,52.04 163.25,50.81 163.25,47.79 162.59,47.13 162.59,16.431 166.689,12.332 R65.1@171.422,12.332 ; K5.2@165.449,12.96 ccw(c163.971,12.96) 165.016,14.005 ccw(c166.061,15.049) K5.2@166.061,13.572 ; K5.2@165.857,12.756 ccw(c166.883,13.782) 166.883,12.332 ; K5.2@166.069,12.968 ccw(c167.607,14.506) 167.607,12.332 ; K5.2@166.282,13.181 ccw(c168.331,15.23) C33.2@168.331,12.332 ; K5.2@166.494,13.393 ccw(c169.056,15.955) C33.2@169.056,12.332 ; 167.62,12.332 ccw(c167.62,13.572) C33.2@168.497,12.695 ; 167.718,12.332 cw(c167.718,11.23) C33.2@168.497,12.009 ; C33.2@169.183,12.009 cw(c169.962,11.23) 169.962,12.332 ; C33.2@169.183,12.695 ccw(c170.06,13.572) 170.06,12.332 ; R65.1@171.079,11.989 ccw(c170.252,11.161) 170.252,12.332 ccw(c170.252,13.502) R65.1@171.079,12.675
  Bottom Layer w0.254: v1@63.522,14.832 cw(c63.142,14.452) 63.68,14.452 cw(c64.218,14.452) v1@63.838,14.832 ; v1(63.68,14.99) 63.68,12.96 67.42,9.22 92.71,9.22 98.45,14.96 98.45,41.09 99.73,42.37 133.67,42.37 137.05,45.75 JP2.31@137.05,48.155 ; JP2.31@136.609,47.714 cw(c135.546,46.651) 137.05,46.651 cw(c138.554,46.651) JP2.31@137.491,47.714 ; JP2.31@136.789,47.894 cw(c136.159,47.264) 137.05,47.264 cw(c137.941,47.264) JP2.31@137.311,47.894
  Bottom Layer w0.3: K5.3@160.321,12.96 K5.2@166.061,12.96 ; K5.3@160.753,12.527 cw(c161.798,11.482) 161.798,12.96 cw(c161.798,14.437) K5.3@160.753,13.393 ; K5.2@165.628,12.527 ccw(c164.583,11.482) 164.583,12.96 ccw(c164.583,14.437) K5.2@165.628,13.393
KEY6: C34.2 JP2.32 JP5.8 K6.2 K6.3 R66.1 U3.48 | length 193.3
  Top Layer w0.254: v1@64.202,14.168 ccw(c63.822,14.548) 64.36,14.548 ccw(c64.898,14.548) v1@64.518,14.168 ; v1(64.36,14.01) 64.36,16.8 65.17,17.61 U3.48@66.44,17.61
  Top Layer w0.3: JP5.8@161.596,49.076 cw(c160.571,48.051) 162.02,48.051 cw(c163.469,48.051) JP5.8@162.444,49.076 ; JP5.8@162.02,49.5 162.02,7.59 164.58,5.03 K6.2@166.061,5.03 166.709,4.382 R66.1@171.442,4.382 ; K6.2@165.628,4.597 ccw(c164.583,3.552) 164.583,5.03 ccw(c164.583,6.507) K6.2@165.628,5.463 ; 167.607,4.382 cw(c167.607,3.123) C34.2@168.497,4.013 ; 167.731,4.382 ccw(c167.731,5.465) C34.2@168.497,4.699 ; C34.2@169.183,4.013 cw(c170.073,3.123) 170.073,4.382 ; C34.2@169.183,4.699 ccw(c169.949,5.465) 169.949,4.382 ; R66.1@171.099,4.039 ccw(c170.272,3.211) 170.272,4.382 ccw(c170.272,5.552) R66.1@171.099,4.725
  Bottom Layer w0.254: v1@64.202,13.852 cw(c63.822,13.472) 64.36,13.472 cw(c64.898,13.472) v1@64.518,13.852 ; v1(64.36,14.01) 64.36,13.23 67.9,9.69 92.51,9.69 97.94,15.12 97.94,41.48 99.34,42.88 132.94,42.88 135.82,45.76 135.82,49.465 JP2.32@137.05,50.695 ; JP2.32@136.427,50.695 cw(c134.923,50.695) 135.986,49.631 cw(c137.05,48.568) JP2.32@137.05,50.072 ; JP2.32@136.681,50.695 cw(c135.79,50.695) 136.42,50.065 cw(c137.05,49.435) JP2.32@137.05,50.326
  Bottom Layer w0.3: K6.3@160.321,5.03 K6.2@166.061,5.03 ; K6.3@160.753,4.597 cw(c161.798,3.552) 161.798,5.03 cw(c161.798,6.507) K6.3@160.753,5.463 ; K6.2@165.628,4.597 ccw(c164.583,3.552) 164.583,5.03 ccw(c164.583,6.507) K6.2@165.628,5.463
LCD_DATA0: JP2.19 R32.1 | length 55.1
  Top Layer w0.254: R32.1@102.776,7.478 104.178,7.478 108.85,12.15 108.85,23.206 112.48,26.836 112.48,36.33 121.84,45.69 121.84,48.125 JP2.19@121.81,48.155 ; R32.1@103.262,7.119 cw(c104.129,6.251) 104.129,7.478 cw(c104.129,8.704) R32.1@103.262,7.837 ; JP2.19@121.369,47.714 cw(c120.234,46.578) 121.84,46.578 ; JP2.19@121.549,47.894 cw(c120.847,47.191) 121.84,47.191 ; 121.84,46.723 cw(c123.242,46.723) JP2.19@122.251,47.714 ; 121.84,47.336 cw(c122.628,47.336) JP2.19@122.071,47.894
LCD_DATA1: JP2.20 R33.1 | length 61.6
  Top Layer w0.254: R33.1@95.646,7.478 96.968,7.478 ; R33.1@96.139,7.125 cw(c96.968,6.327) 96.968,7.478 ; R33.1@96.139,7.83 ccw(c96.968,8.629) 96.968,7.478 ; 120.808,49.988 cw(c121.645,49.151) JP2.20@121.771,50.328 ; 120.955,50.135 ccw(c120.396,50.695) JP2.20@121.187,50.695 ; JP2.20@121.68,50.86 120.58,49.76 120.58,45.76 111.97,37.15 111.97,26.968 108.36,23.358 108.36,13.49 104.12,9.25 98.74,9.25 96.968,7.478
LCD_DATA2: JP2.17 R34.1 | length 50.6
  Top Layer w0.254: R34.1@102.776,10.909 104.139,10.909 107.83,14.6 107.83,23.47 111.38,27.02 111.38,37.92 119.27,45.81 JP2.17@119.27,48.155 ; R34.1@103.262,10.55 cw(c104.129,9.682) 104.129,10.909 cw(c104.129,12.135) R34.1@103.262,11.268 ; JP2.17@118.829,47.714 cw(c117.766,46.651) 119.27,46.651 cw(c120.774,46.651) JP2.17@119.711,47.714 ; JP2.17@119.009,47.894 cw(c118.379,47.264) 119.27,47.264 cw(c120.161,47.264) JP2.17@119.531,47.894
LCD_DATA3: JP2.18 R35.1 | length 59.2
  Top Layer w0.254: R35.1@95.646,10.909 97.199,10.909 99,12.71 104.21,12.71 107.34,15.84 107.34,23.67 110.9,27.23 110.9,38.72 117.91,45.73 117.91,49.335 JP2.18@119.27,50.695 ; R35.1@96.132,10.55 cw(c96.999,9.682) 96.999,10.909 cw(c96.999,12.135) R35.1@96.132,11.268 ; JP2.18@118.647,50.695 cw(c117.143,50.695) 118.206,49.631 cw(c119.27,48.568) JP2.18@119.27,50.072 ; JP2.18@118.901,50.695 cw(c118.01,50.695) 118.64,50.065 cw(c119.27,49.435) JP2.18@119.27,50.326
LCD_DATA4: JP2.15 R36.1 | length 45.8
  Top Layer w0.254: R36.1@103.262,13.981 cw(c104.129,13.114) 104.129,14.34 cw(c104.129,15.566) R36.1@103.262,14.699 ; R36.1@103.392,14.201 cw(c103.576,14.148) 103.576,14.34 ; R36.1@103.392,14.479 ccw(c103.576,14.532) 103.576,14.34 ; JP2.15@116.289,47.714 cw(c115.226,46.651) 116.73,46.651 cw(c118.234,46.651) JP2.15@117.171,47.714 ; JP2.15@116.469,47.894 cw(c115.839,47.264) 116.73,47.264 cw(c117.621,47.264) JP2.15@116.991,47.894 ; JP2.15@116.73,48.155 116.73,45.76 110.44,39.47 110.44,27.45 106.87,23.88 106.87,17.01 104.2,14.34 103.576,14.34
LCD_DATA5: JP2.16 R37.1 | length 54.7
  Top Layer w0.254: R37.1@95.646,14.34 97.29,14.34 99.08,16.13 104.17,16.13 106.38,18.34 106.38,24.05 109.98,27.65 109.98,40.23 115.49,45.74 115.49,49.455 JP2.16@116.73,50.695 ; R37.1@96.132,13.981 cw(c96.999,13.114) 96.999,14.34 cw(c96.999,15.566) R37.1@96.132,14.699 ; JP2.16@116.107,50.695 cw(c114.603,50.695) 115.666,49.631 cw(c116.73,48.568) JP2.16@116.73,50.072 ; JP2.16@116.361,50.695 cw(c115.47,50.695) 116.1,50.065 cw(c116.73,49.435) JP2.16@116.73,50.326
LCD_DATA6: JP2.13 R42.1 | length 41.6
  Top Layer w0.254: R42.1@102.776,17.771 104.161,17.771 105.91,19.52 105.91,24.23 109.52,27.84 109.52,41.07 114.19,45.74 JP2.13@114.19,48.155 ; R42.1@103.262,17.412 cw(c104.129,16.545) 104.129,17.771 cw(c104.129,18.997) R42.1@103.262,18.13 ; JP2.13@113.749,47.714 cw(c112.686,46.651) 114.19,46.651 cw(c115.694,46.651) JP2.13@114.631,47.714 ; JP2.13@113.929,47.894 cw(c113.299,47.264) 114.19,47.264 cw(c115.081,47.264) JP2.13@114.451,47.894
LCD_DATA7: JP2.14 R43.1 | length 50.2
  Top Layer w0.254: R43.1@95.646,17.771 97.261,17.771 99.11,19.62 104.2,19.62 105.44,20.86 105.44,24.41 109.04,28.01 109.04,41.82 112.91,45.69 112.91,49.415 JP2.14@114.19,50.695 ; R43.1@96.132,17.412 cw(c96.999,16.545) 96.999,17.771 cw(c96.999,18.997) R43.1@96.132,18.13 ; JP2.14@113.567,50.695 cw(c112.063,50.695) 113.126,49.631 cw(c114.19,48.568) JP2.14@114.19,50.072 ; JP2.14@113.821,50.695 cw(c112.93,50.695) 113.56,50.065 cw(c114.19,49.435) JP2.14@114.19,50.326
LCD_DATA8: JP2.11 R44.1 | length 37.1
  Top Layer w0.254: R44.1@102.776,21.202 104.192,21.202 104.97,21.98 104.97,24.61 108.58,28.22 108.58,42.64 111.65,45.71 JP2.11@111.65,48.155 ; R44.1@103.262,20.843 cw(c104.129,19.976) 104.129,21.202 cw(c104.129,22.429) R44.1@103.262,21.561 ; JP2.11@111.209,47.714 cw(c110.146,46.651) 111.65,46.651 cw(c113.154,46.651) JP2.11@112.091,47.714 ; JP2.11@111.389,47.894 cw(c110.759,47.264) 111.65,47.264 cw(c112.541,47.264) JP2.11@111.911,47.894
LCD_DATA9: JP2.12 R45.1 | length 45.8
  Top Layer w0.254: R45.1@95.646,21.202 97.422,21.202 99.11,22.89 104.16,22.89 104.51,23.24 104.51,24.81 108.1,28.4 108.1,43.41 110.39,45.7 110.39,49.435 JP2.12@111.65,50.695 ; R45.1@96.132,20.843 cw(c96.999,19.976) 96.999,21.202 cw(c96.999,22.429) R45.1@96.132,21.561 ; JP2.12@111.027,50.695 cw(c109.523,50.695) 110.586,49.631 cw(c111.65,48.568) JP2.12@111.65,50.072 ; JP2.12@111.281,50.695 cw(c110.39,50.695) 111.02,50.065 cw(c111.65,49.435) JP2.12@111.65,50.326
LCD_DATA10: JP2.9 R46.1 | length 32.6
  Top Layer w0.254: R46.1@102.903,24.633 cw(c103.44,24.508) R46.1@103.44,25.06 ; R46.1@102.91,25.06 104.08,25.06 ; R46.1@103.15,24.576 cw(c103.76,24.434) 103.76,25.06 ; R46.1@103.398,24.518 cw(c104.08,24.36) 104.08,25.06 ; 107.625,28.605 104.08,25.06 ; 107.63,28.6 107.63,44.28 109.11,45.76 JP2.9@109.11,48.155 ; JP2.9@108.669,47.714 cw(c107.606,46.651) 109.11,46.651 cw(c110.614,46.651) JP2.9@109.551,47.714 ; JP2.9@108.849,47.894 cw(c108.219,47.264) 109.11,47.264 cw(c110.001,47.264) JP2.9@109.371,47.894
LCD_DATA11: JP2.10 R47.1 | length 41.4
  Top Layer w0.254: R47.1@95.646,24.633 97.513,24.633 99.09,26.21 104.12,26.21 107.12,29.21 107.12,45.08 107.78,45.74 107.78,49.365 JP2.10@109.11,50.695 ; R47.1@96.132,24.274 cw(c96.999,23.407) 96.999,24.633 cw(c96.999,25.86) R47.1@96.132,24.992 ; JP2.10@108.487,50.695 cw(c106.983,50.695) 108.046,49.631 cw(c109.11,48.568) JP2.10@109.11,50.072 ; JP2.10@108.741,50.695 cw(c107.85,50.695) 108.48,50.065 cw(c109.11,49.435) JP2.10@109.11,50.326
LCD_DATA12: JP2.7 R48.1 | length 27.4
  Top Layer w0.254: R48.1@103.262,27.705 cw(c104.129,26.838) 104.129,28.064 cw(c104.129,29.291) R48.1@103.262,28.424 ; R48.1@103.392,27.925 cw(c103.576,27.873) 103.576,28.064 ; R48.1@103.392,28.204 ccw(c103.576,28.256) 103.576,28.064 ; JP2.7@106.129,47.714 cw(c104.849,46.433) 106.66,46.433 ; JP2.7@106.309,47.894 cw(c105.462,47.046) 106.66,47.046 ; 106.66,46.868 cw(c107.857,46.868) JP2.7@107.011,47.714 ; JP2.7@106.66,48.155 106.66,30.58 104.144,28.064 103.576,28.064
LCD_DATA13: JP2.8 R49.1 | length 37.6
  Top Layer w0.254: R49.1@95.646,28.064 97.414,28.064 99.11,29.76 104.16,29.76 106.2,31.8 106.2,44.69 105.24,45.65 105.24,49.365 JP2.8@106.57,50.695 ; R49.1@96.132,27.705 cw(c96.999,26.838) 96.999,28.064 cw(c96.999,29.291) R49.1@96.132,28.424 ; JP2.8@105.947,50.695 cw(c104.443,50.695) 105.506,49.631 cw(c106.57,48.568) JP2.8@106.57,50.072 ; JP2.8@106.201,50.695 cw(c105.31,50.695) 105.94,50.065 cw(c106.57,49.435) JP2.8@106.57,50.326
LCD_DATA14: JP2.5 R50.1 | length 24.6
  Top Layer w0.254: R50.1@103.272,31.146 cw(c104.085,30.374) 104.085,31.495 ; R50.1@103.272,31.845 ccw(c104.085,32.617) 104.085,31.495 ; R50.1@103.392,31.356 cw(c103.576,31.304) 103.576,31.495 ; R50.1@103.392,31.635 ccw(c103.576,31.687) 103.576,31.495 ; JP2.5@103.589,47.714 cw(c102.526,46.651) 104.03,46.651 cw(c105.534,46.651) JP2.5@104.471,47.714 ; JP2.5@103.769,47.894 cw(c103.139,47.264) 104.03,47.264 cw(c104.921,47.264) JP2.5@104.291,47.894 ; JP2.5@104.03,48.155 104.03,45.65 105.73,43.95 105.73,33.14 104.085,31.495 ; 103.576,31.495 104.085,31.495
LCD_DATA15: JP2.6 R51.1 | length 34.4
  Top Layer w0.254: R51.1@95.646,31.495 97.345,31.495 99.11,33.26 104.14,33.26 105.27,34.39 105.27,43.21 102.79,45.69 102.79,49.455 JP2.6@104.03,50.695 ; R51.1@96.132,31.136 cw(c96.999,30.269) 96.999,31.495 cw(c96.999,32.722) R51.1@96.132,31.855 ; JP2.6@103.407,50.695 cw(c101.903,50.695) 102.966,49.631 cw(c104.03,48.568) JP2.6@104.03,50.072 ; JP2.6@103.661,50.695 cw(c102.77,50.695) 103.4,50.065 cw(c104.03,49.435) JP2.6@104.03,50.326
LCD_DE: JP2.3 R52.1 | length 21.6
  Top Layer w0.254: JP2.3@101.049,47.714 cw(c99.986,46.651) 101.49,46.651 cw(c102.994,46.651) JP2.3@101.931,47.714 ; JP2.3@101.229,47.894 cw(c100.599,47.264) 101.49,47.264 cw(c102.381,47.264) JP2.3@101.751,47.894 ; JP2.3@101.49,48.155 101.49,45.73 104.8,42.42 104.8,35.61 104.116,34.926 ; R52.1@103.265,34.57 cw(c104.116,33.731) 104.116,34.926 ; R52.1@103.265,35.283 ccw(c104.116,36.122) 104.116,34.926 ; R52.1@103.392,34.787 cw(c103.576,34.735) 103.576,34.926 ; R52.1@103.392,35.066 ccw(c103.576,35.118) 103.576,34.926 ; 103.576,34.926 104.116,34.926
LCD_HSYNC: JP2.4 R53.1 | length 31.2
  Top Layer w0.254: R53.1@95.646,34.926 97.526,34.926 99.12,36.52 103.99,36.52 104.34,36.87 104.34,41.65 100.29,45.7 100.29,49.495 JP2.4@101.49,50.695 ; R53.1@96.132,34.567 cw(c96.999,33.7) 96.999,34.926 cw(c96.999,36.153) R53.1@96.132,35.286 ; JP2.4@100.867,50.695 cw(c99.363,50.695) 100.426,49.631 cw(c101.49,48.568) JP2.4@101.49,50.072 ; JP2.4@101.121,50.695 cw(c100.23,50.695) 100.86,50.065 cw(c101.49,49.435) JP2.4@101.49,50.326
LCD_PLCK: JP2.1 R54.1 | length 17.7
  Top Layer w0.254: JP2.1@98.509,47.714 cw(c97.446,46.651) 98.95,46.651 cw(c100.454,46.651) JP2.1@99.391,47.714 ; JP2.1@98.689,47.894 cw(c98.059,47.264) 98.95,47.264 cw(c99.841,47.264) JP2.1@99.211,47.894 ; JP2.1@98.95,48.155 98.95,45.71 102.92,41.74 R54.1@102.92,38.358 ; R54.1@102.544,38.717 ccw(c101.636,39.625) 102.92,39.625 ; R54.1@102.723,38.537 ccw(c102.249,39.012) 102.92,39.012 ; 102.92,39.543 ccw(c104.088,39.543) R54.1@103.262,38.717
LCD_VSYNC: JP2.2 R55.1 | length 20.6
  Top Layer w0.254: R55.1@95.287,38.717 ccw(c94.42,39.584) 95.646,39.584 ccw(c96.872,39.584) R55.1@96.005,38.717 ; R55.1@95.646,38.358 95.646,49.476 96.865,50.695 JP2.2@98.95,50.695 ; JP2.2@98.509,50.254 ccw(c97.446,49.191) 97.446,50.695 ccw(c97.446,52.199) JP2.2@98.509,51.135 ; JP2.2@98.689,50.434 ccw(c98.059,49.804) 98.059,50.695 ccw(c98.059,51.585) JP2.2@98.689,50.956
NetC8_1: C8.1 U2.6 Y1.1 | length 9.5
  Top Layer w0.254: C8.1@22.84,26.543 ccw(c23.861,27.564) 23.861,26.12 ; C8.1@22.84,26.67 C8.1@23.39,26.12 ; C8.1@23.02,26.723 ccw(c24.474,28.177) 24.474,26.12 ; C8.1@23.199,26.902 ccw(c25.088,28.791) 25.088,26.12 ; Y1.1@26.011,25.761 ccw(c25.144,24.894) 25.144,26.12 ccw(c25.144,27.346) Y1.1@26.011,26.479 ; Y1.1@26.729,25.761 cw(c27.596,24.894) 27.596,26.12 cw(c27.596,27.346) Y1.1@26.729,26.479